# EAGLE board KKCTBN 2022 BOARD (EAGLE 9.6.1)
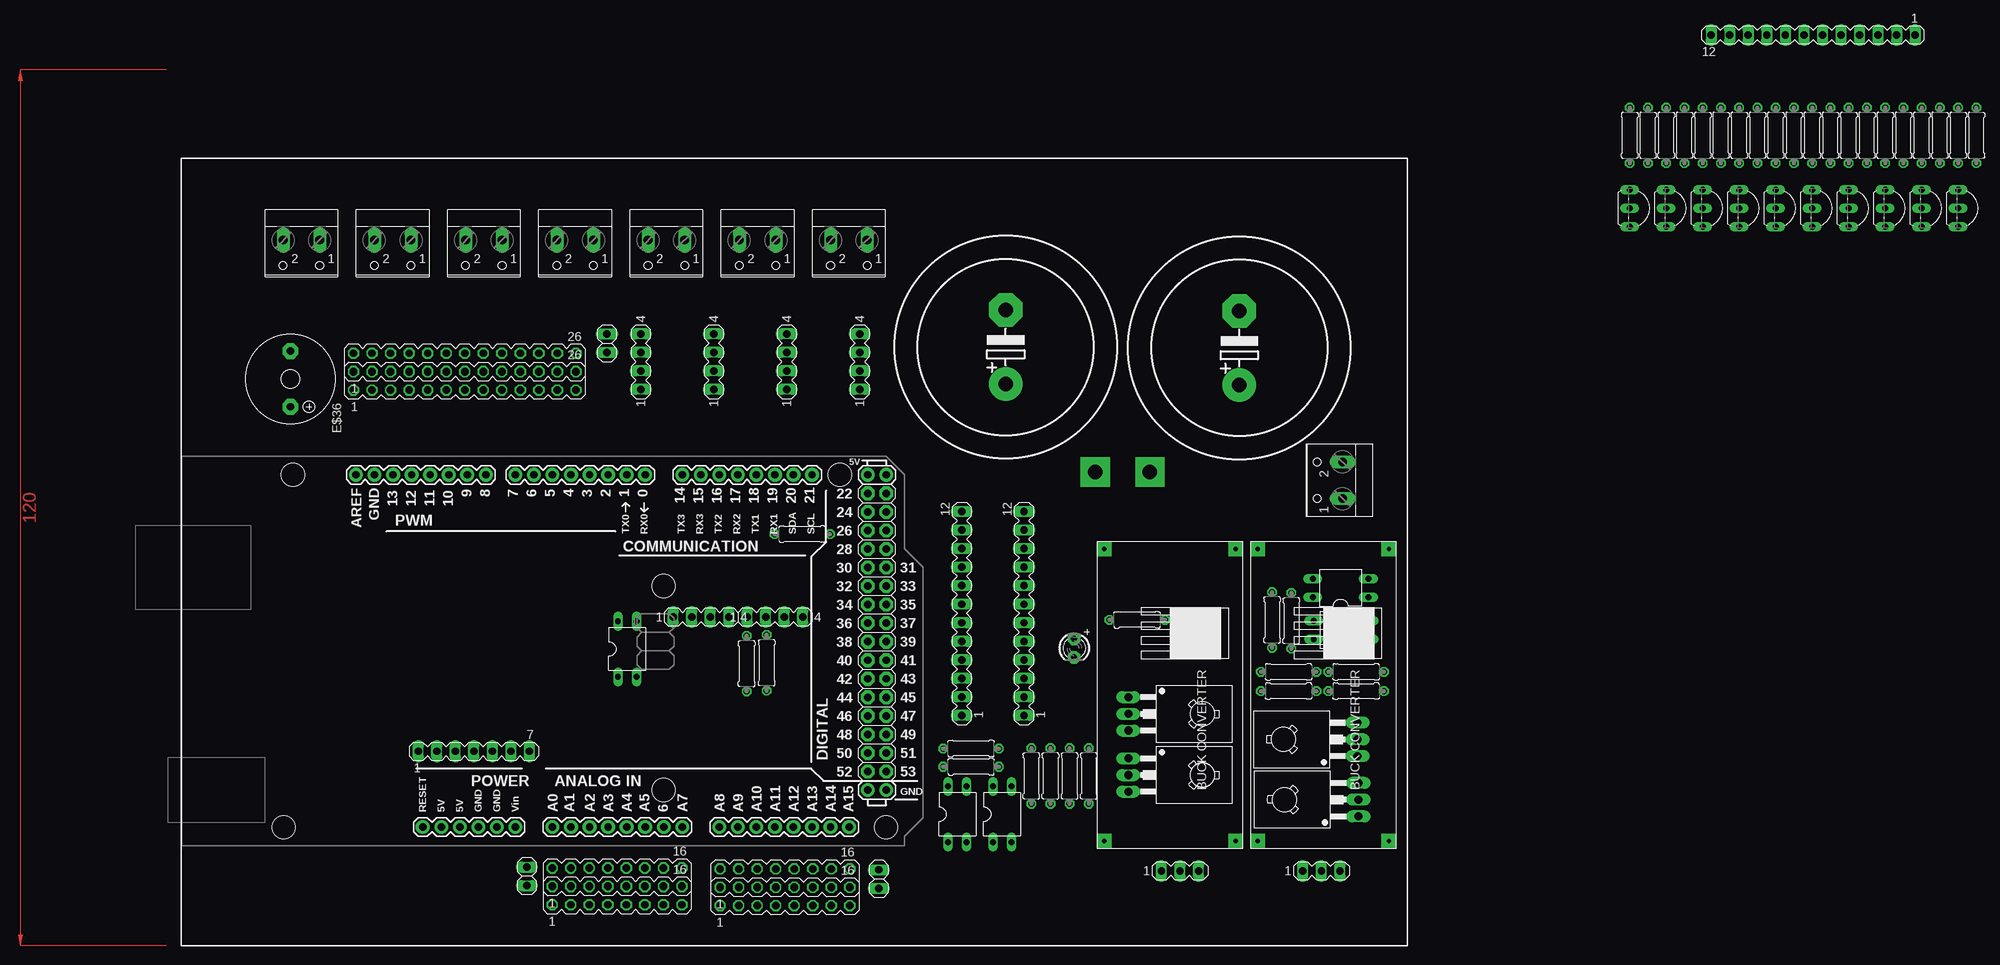
[diagram p0: board, top side]
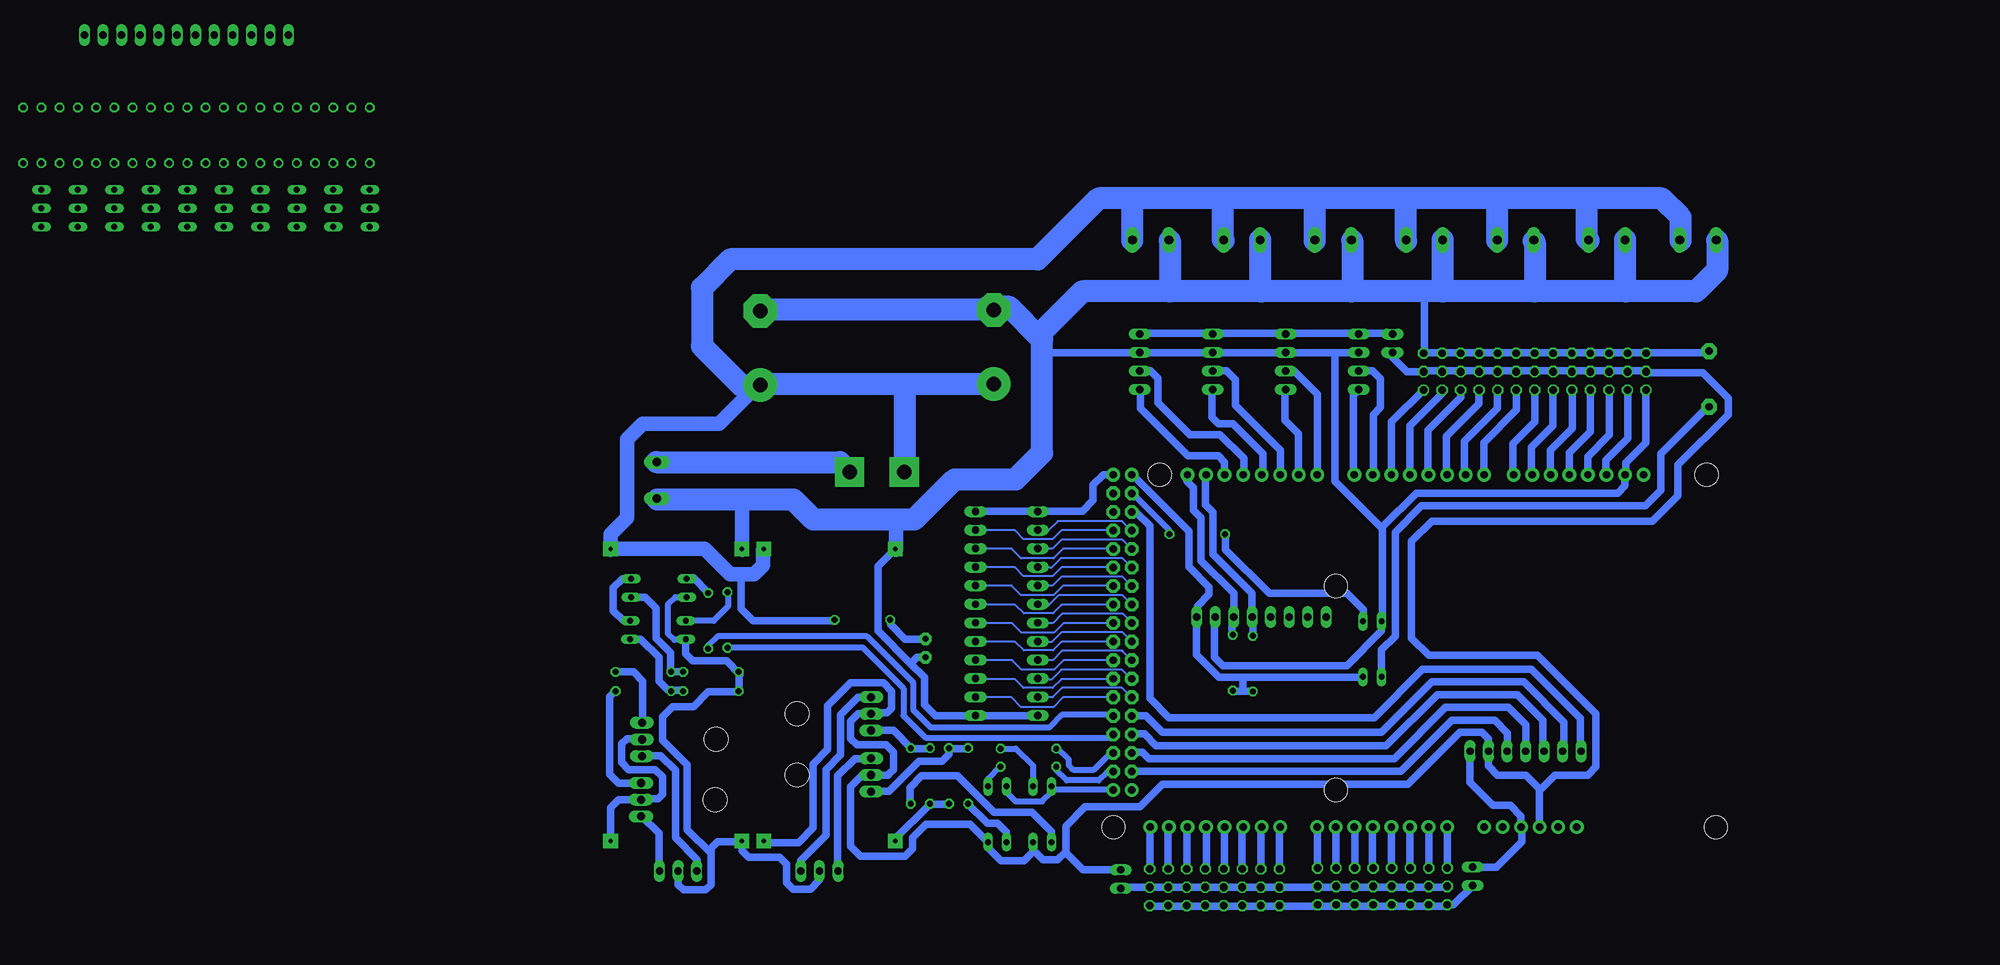
[diagram p1: board, bottom side, seen from below]

No outline drawn. Coordinates in mm, seen from the top.
Copper layers (1*16): Top 0.035mm / dielectric 1.5mm / Bottom 0.035mm
Design rules "default": minimum track width 6mil, minimum drill 0.35mm, track to track 6mil, track to pad 6mil, pad to pad 6mil, via to via 6mil, smd to smd 6mil, copper to edge 40mil, drill to drill 6mil, minimum pad ring 10mil, minimum via ring 8mil, stop-mask expansion 4mil, vias tented up to drill 0mil, thermal gap 10mil

## Footprints (pad centres in the part's own frame; a part is rotated, then mirrored left to right if it is on the bottom)
ARDUINO_MEGA = drill 1.016 pad 1.88: 0 13.97,24.13; 1 11.43,24.13; 2 8.89,24.13; 3 6.35,24.13; 3.3V -13.97,-24.13; 4 3.81,24.13; 5 1.27,24.13; 5V@0 -11.43,-24.13; 5V@1 44.45,24.13; 5V@2 46.99,24.13; 6 -1.27,24.13; 7 -3.81,24.13; 8 -7.874,24.13; 9 -10.414,24.13; 10 -12.954,24.13; 11 -15.494,24.13; 12 -18.034,24.13; 13 -20.574,24.13; 14 19.05,24.13; 15 21.59,24.13; 16 24.13,24.13; 17 26.67,24.13; 18 29.21,24.13; 19 31.75,24.13; 20 34.29,24.13; 21 36.83,24.13; A0 1.27,-24.13; A1 3.81,-24.13; A2 6.35,-24.13; A3 8.89,-24.13; A4 11.43,-24.13; A5 13.97,-24.13; A6 16.51,-24.13; A7 19.05,-24.13; A8 24.13,-24.13; A9 26.67,-24.13; A10 29.21,-24.13; A11 31.75,-24.13; A12 34.29,-24.13; A13 36.83,-24.13; A14 39.37,-24.13; A15 41.91,-24.13; AREF -25.654,24.13; GND@0 -8.89,-24.13; GND@1 -6.35,-24.13; GND@2 44.45,-19.05; GND@3 46.99,-19.05; GND@4 -23.114,24.13; RESET -16.51,-24.13; VIN -3.81,-24.13 | drill 1.016 pad 1.88 octagon: 22 44.45,21.59; 23 46.99,21.59; 24 44.45,19.05; 25 46.99,19.05; 26 44.45,16.51; 27 46.99,16.51; 28 44.45,13.97; 29 46.99,13.97; 30 44.45,11.43; 31 46.99,11.43; 32 44.45,8.89; 33 46.99,8.89; 34 44.45,6.35; 35 46.99,6.35; 36 44.45,3.81; 37 46.99,3.81; 38 44.45,1.27; 39 46.99,1.27; 40 44.45,-1.27; 41 46.99,-1.27; 42 44.45,-3.81; 43 46.99,-3.81; 44 44.45,-6.35; 45 46.99,-6.35; 46 44.45,-8.89; 47 46.99,-8.89; 48 44.45,-11.43; 49 46.99,-11.43; 50 44.45,-13.97; 51 46.99,-13.97; 52 44.45,-16.51; 53 46.99,-16.51 | hole 3.2: -34.29,24.13; -35.56,-24.13; 16.51,8.89; 16.51,-19.05; 40.64,24.13; 46.99,-24.13
MA04-1 = drill 1.016 long: 1 -3.81,0; 2 -1.27,0; 3 1.27,0; 4 3.81,0
MA13-2 = drill 1.016 octagon: 1 -15.24,-1.27; 2 -15.24,1.27; 3 -12.7,-1.27; 4 -12.7,1.27; 5 -10.16,-1.27; 6 -10.16,1.27; 7 -7.62,-1.27; 8 -7.62,1.27; 9 -5.08,-1.27; 10 -5.08,1.27; 11 -2.54,-1.27; 12 -2.54,1.27; 13 0,-1.27; 14 0,1.27; 15 2.54,-1.27; 16 2.54,1.27; 17 5.08,-1.27; 18 5.08,1.27; 19 7.62,-1.27; 20 7.62,1.27; 21 10.16,-1.27; 22 10.16,1.27; 23 12.7,-1.27; 24 12.7,1.27; 25 15.24,-1.27; 26 15.24,1.27
TO92-BCE = drill 0.813 long: B -2.54,0; C 0,0; E 2.54,0
0207/7 = drill 0.813 octagon: 1 -3.81,0; 2 3.81,0
MA12-1 = drill 1.016 long: 1 -13.97,0; 2 -11.43,0; 3 -8.89,0; 4 -6.35,0; 5 -3.81,0; 6 -1.27,0; 7 1.27,0; 8 3.81,0; 9 6.35,0; 10 8.89,0; 11 11.43,0; 12 13.97,0
BUCK_CONV = drill 0.6 pad 2 square: IN+ -17,48; IN- -17,30; OUT+ 23,48; OUT- 23,30
DIL04 = drill 0.813 long: 1 -1.27,-3.81; 2 1.27,-3.81; 3 1.27,3.81; 4 -1.27,3.81
F/TMB = drill 1.016 pad 2.159 octagon: + 3.81,0; - -3.81,0
EB30D = drill 2.007 pad 4.597: + -5.08,0 | drill 2.007 pad 4.597 octagon: - 5.08,0
W237-102 = drill 1.194 long: 1 -2.5,-1.27; 2 2.5,-1.27
MA07-1 = drill 1.016 long: 1 -7.62,0; 2 -5.08,0; 3 -2.54,0; 4 0,0; 5 2.54,0; 6 5.08,0; 7 7.62,0
TO126 = drill 1.118 long: 1 -2.286,-5.08; 2 0,-5.08; 3 2.286,-5.08 | hole 3.302: 0,5.08
MA03-1 = drill 1.016 long: 1 -2.54,0; 2 0,0; 3 2.54,0
1X02 = drill 1.016 long: 1 -1.27,0; 2 1.27,0
MA08-2 = drill 1.016 octagon: 1 -8.89,-1.27; 2 -8.89,1.27; 3 -6.35,-1.27; 4 -6.35,1.27; 5 -3.81,-1.27; 6 -3.81,1.27; 7 -1.27,-1.27; 8 -1.27,1.27; 9 1.27,-1.27; 10 1.27,1.27; 11 3.81,-1.27; 12 3.81,1.27; 13 6.35,-1.27; 14 6.35,1.27; 15 8.89,-1.27; 16 8.89,1.27
LED3MM = drill 0.813 pad 1.676 octagon: A -1.27,0; K 1.27,0

## Placement (x,y rotation side)
E$1  [ARDUINO_MEGA]  81.63,30.37 0 top
E$2  [MA04-1]  113.38,35 0 top
E$3  [MA04-1]  103.25,35 0 top
E$4  [MA04-1]  125,70 90 top
E$5  [MA04-1]  115,70 90 top
E$6  [MA04-1]  105,70 90 top
E$7  [MA04-1]  95,70 90 top
E$8  [MA13-2]  70.88,67.38 0 top
E$9  [MA13-2]  70.88,69.88 0 top
E$10  [TO92-BCE]  230.5,91 270 top
E$11  [0207/7]  230.5,101 270 top
E$12  [0207/7]  233,101 270 top
E$13  [TO92-BCE]  235.5,91 270 top
E$14  [0207/7]  235.5,101 270 top
E$15  [0207/7]  238,101 270 top
E$16  [MA12-1]  139,35.5 90 top
E$17  [MA12-1]  147.5,35.5 90 top
E$18  [BUCK_CONV]  128.5,27.31 270 top
E$19  [TO92-BCE]  240.5,91 270 top
E$20  [0207/7]  240.5,101 270 top
E$21  [0207/7]  243,101 270 top
E$22  [TO92-BCE]  245.5,91 270 top
E$23  [0207/7]  245.5,101 270 top
E$24  [0207/7]  248,101 270 top
E$25  [TO92-BCE]  250.5,91 270 top
E$26  [0207/7]  250.5,101 270 top
E$27  [0207/7]  253,101 270 top
E$28  [TO92-BCE]  255.5,91 270 top
E$29  [0207/7]  255.5,101 270 top
E$30  [0207/7]  258,101 270 top
E$31  [TO92-BCE]  260.5,91 270 top
E$32  [0207/7]  260.5,101 270 top
E$33  [0207/7]  263,101 270 top
E$34  [MA12-1]  255.62,114.75 180 top
E$35  [DIL04]  144.5,8 0 top
E$36  [F/TMB]  47,67.62 270 top
E$37  [TO92-BCE]  265.5,91 270 top
E$38  [0207/7]  265.5,101 270 top
E$39  [0207/7]  268,101 270 top
E$40  [TO92-BCE]  270.5,91 270 top
E$41  [0207/7]  270.5,101 270 top
E$42  [0207/7]  273,101 270 top
E$43  [TO92-BCE]  275.5,91 270 top
E$44  [0207/7]  275.5,101 270 top
E$45  [0207/7]  278,101 270 top
E$46  [BUCK_CONV]  149.5,27.31 270 top
E$47  [EB30D]  177,71.88 90 top
E$48  [EB30D]  145,72 90 top
E$49  [W237-102]  189.88,53.75 90 top
E$50  [DIL04]  93.12,30.62 0 top
E$51  [0207/7]  140.25,17 0 top
E$52  [0207/7]  117.12,46.38 0 top
E$53  [MA07-1]  72.12,16.62 0 top
E$54  [DIL04]  138.38,8 0 top
E$55  [0207/7]  140.25,14.5 0 top
E$56  [TO126]  188.12,18.25 90 top
E$57  [TO126]  188.25,10 90 top
E$58  [TO126]  166.88,21.75 270 top
E$59  [TO126]  166.88,13.38 270 top
E$60  [W237-102]  48.5,85.38 180 top
E$61  [W237-102]  61,85.38 180 top
E$62  [W237-102]  73.5,85.38 180 top
E$63  [W237-102]  86,85.38 180 top
E$64  [W237-102]  98.5,85.38 180 top
E$65  [W237-102]  111,85.38 180 top
E$66  [W237-102]  123.5,85.38 180 top
E$67  [MA03-1]  168.88,0.25 0 top
E$68  [DIL04]  190.88,39 90 top
E$69  [DIL04]  191,33.25 90 top
E$70  [0207/7]  184.12,34.5 90 top
E$71  [0207/7]  181.5,34.62 90 top
E$72  [MA03-1]  188.25,0.25 0 top
E$73  [0207/7]  153.75,13.25 90 top
E$74  [0207/7]  156.38,13.25 90 top
E$75  [0207/7]  148.5,13.25 90 top
E$76  [0207/7]  151.12,13.25 90 top
E$77  [0207/7]  183.75,27.5 180 top
E$78  [0207/7]  183.75,24.88 180 top
E$79  [0207/7]  193,27.5 180 top
E$80  [0207/7]  193,24.88 180 top
E$81  [1X02]  90.38,72.5 90 top
E$82  [MA08-2]  91.75,-0.62 0 top
E$83  [MA08-2]  114.75,-0.75 0 top
E$84  [MA08-2]  114.75,-3.25 0 top
E$85  [MA08-2]  91.75,-3.12 0 top
E$86  [1X02]  127.62,-0.88 270 top
E$87  [1X02]  79.38,-0.5 270 top
E$88  [LED3MM]  154.38,30.75 270 top
E$89  [0207/7]  163,34.62 0 top
E$90  [0207/7]  109.5,28.62 90 top
E$91  [0207/7]  112.25,28.75 90 top

## Library data of the parts
E$1 = SparkFun-Boards
E$2-E$9 E$16 E$17 E$34 E$53 E$67 E$72 E$82-E$85 = con-lstb
E$10 E$13 E$19 E$22 E$25 E$28 E$31 E$37 E$40 E$43 = transistor-neu-to92
E$11 E$12 E$14 E$15 E$20 E$21 E$23 E$24 E$26 E$27 E$29 E$30 E$32 E$33 E$38 E$39 E$41 E$42 E$44 E$45 E$51 E$52 E$55 E$70 E$71 E$73-E$80 E$89-E$91 = resistor
E$18 E$46 = KRSBI COMPONENT
E$35 E$50 E$54 E$68 E$69 = ic-package
E$36 = buzzer
E$47 E$48 = rcl
E$49 E$60-E$66 = con-wago-500
E$56-E$59 = transistor-fet
E$81 E$86 E$87 = Connector
E$88 = adafruit

## Nets
S$68: E$53.4
S$81: E$67.2

## Tracks (layer width: path | path; a pad name or v marks a point on that pad's centre or on a via)
S$1
  Bottom 1: 116,54.62 116,50.38 115,49.38 115,43.62 109.62,38.25 109.62,34.88
S$2
  Bottom 1: 118.5,54.62 118.5,53.62 117.62,52.75 117.62,49.62 116.62,48.62 116.62,42.75 112.12,38.25 112.12,35 112.38,34.75 112.38,32.38
S$3
  Bottom 1: 125.25,73.75 125.12,73.88 95,73.88 93.38,73.88 90.5,73.88 90.38,73.75
S$5
  Bottom 1: 86,66.25 90.5,61.75 90.5,54.38
S$6
  Bottom 1: 83.62,66.25 83.62,65.62 88,61.25 88,54.5
S$7
  Bottom 1: 81,66.25 81,65.12 85.5,60.62 85.5,54.38
S$8
  Bottom 1: 78.5,66.12 78.5,64.25 83,59.75 83,54.5
S$9
  Bottom 1: 76,66.12 76,63.62 80.5,59.12 80.5,54.38
S$10
  Bottom 1: 73.38,66.12 73.38,63.38 77.88,58.88 77.88,54.38
S$11
  Bottom 1: 70.88,66.12 70.88,61.75 73.88,58.75 73.88,54.62
S$12
  Bottom 1: 68.38,66.12 68.38,61.25 71.38,58.25 71.38,54.5
S$13
  Bottom 1: 65.75,66.25 65.75,60.88 68.75,57.88 68.75,54.5
S$14
  Bottom 1: 63.25,66.12 63.25,60.38 66.12,57.5 66.12,54.38
S$15
  Bottom 1: 60.62,66.25 60.62,60 63.62,57 63.62,54.25
S$16
  Bottom 1: 58.12,66.12 58.12,59.5 61.12,56.5 61.12,54.5
S$17
  Bottom 1: 113.38,54.5 113.38,56.25 114.25,57.12 118.38,57.12 124.88,63.62 124.88,66 125.12,66.25
S$18
  Bottom 1: 110.75,54.5 110.75,56.75 114,60 118.12,60 122.5,64.38 122.5,67.75 123.5,68.75 125.25,68.75
S$19
  Bottom 1: 108.12,54.38 108.12,57.38 112.25,61.5 114.25,61.5 115.12,62.38 115.12,66.25
S$20
  Bottom 1: 105.75,54.5 105.75,57.88 111.88,64 111.88,67.5 113.12,68.75 115,68.75
S$21
  Bottom 1: 103.25,54.5 103.25,60.12 105.12,62 105.12,66.25
S$22
  Bottom 1: 100.62,54.38 100.62,65.5 103.88,68.75 105.12,68.75
S$23
  Bottom 1: 95.75,54.5 95.75,65.38 95,66.12
S$24
  Bottom 1: 93,54.5 93,62.75 92,63.75 92,67.62 93.12,68.75 95,68.75
S$25
  Bottom 0.3: 128.62,41.81 135.75,41.81 136.94,40.62 140.94,40.62 142.12,41.81 147.44,41.81
S$26
  Bottom 0.3: 128.62,46.88 135.75,46.88 136.94,45.69 140.94,45.69 142.12,46.88 147.44,46.88
S$27
  Bottom 0.3: 126.06,46.81 127.41,48.16 136.21,48.16 137.56,46.81 139,46.81
S$28
  Bottom 0.3: 128.56,44.38 135.5,44.38 136.81,43.06 141.25,43.06 142.56,44.38 147.44,44.38
S$29
  Bottom 0.3: 126.12,44.38 127.38,45.62 135.69,45.62 136.94,44.38 138.94,44.38
S$30
  Bottom 0.3: 126.06,41.75 127.39,43.07 135.8,43.07 137.12,41.75 139,41.75
S$31
  Bottom 0.3: 128.56,39.31 135.5,39.31 136.81,38 141.25,38 142.56,39.31 147.44,39.31
S$32
  Bottom 0.3: 126.12,39.31 127.34,40.52 135.73,40.52 136.94,39.31 138.94,39.31
S$33
  Bottom 0.3: 128.56,36.69 135.69,36.69 136.88,35.5 140.88,35.5 142.06,36.69 147.38,36.69
S$34
  Bottom 0.3: 126,36.62 127.38,38 136.12,38 137.5,36.62 138.94,36.62
S$35
  Bottom 0.3: 128.5,34.19 135.44,34.19 136.75,32.88 141.19,32.88 142.5,34.19 147.38,34.19
S$36
  Bottom 0.3: 126.06,34.19 127.31,35.44 135.62,35.44 136.88,34.19 138.88,34.19
S$37
  Bottom 0.3: 128.56,31.62 135.69,31.62 136.88,30.44 140.88,30.44 142.06,31.62 147.38,31.62
S$38
  Bottom 0.3: 126,31.56 127.38,32.94 135.69,32.94 137.06,31.56 138.94,31.56
S$39
  Bottom 0.3: 128.5,29.12 135.44,29.12 136.75,27.81 141.19,27.81 142.5,29.12 147.38,29.12
S$40
  Bottom 0.3: 127.31,30.38 135.62,30.38 136.88,29.12 138.88,29.12
S$41  (via drill 2 pad 4)
  Bottom 3: 191.25,56.25 166.12,56.25 v164.75,54.88
S$42
  Bottom 0.3: 126.12,29.06 127.38,30.31
S$43
  Bottom 0.3: 128.62,26.5 135.75,26.5 136.94,25.31 140.94,25.31 142.12,26.5 147.44,26.5
S$44
  Bottom 0.3: 126.06,26.44 127.44,27.81 135.75,27.81 137.12,26.44 139,26.44
S$45
  Bottom 0.3: 128.56,24 135.5,24 136.81,22.69 141.25,22.69 142.56,24 147.44,24
S$46
  Bottom 0.3: 126.12,24 127.44,25.31 135.62,25.31 136.94,24 138.94,24
S$47
  Bottom 2: 158.38,44.25 158.38,48.75 158.5,48.88
S$48  (via drill 2 pad 4)
  other vias: 157.25,54.88
S$49
  Bottom 2: 197.5,44.38 184.62,44.38 181.12,40.88 177.88,40.88 176.62,42.12 176.62,44.25
S$50
  Bottom 1: 187,40.38 186.12,40.38 184.12,38.38
S$51
  Bottom 3: 50.88,86.62 50.88,89.75 53.5,92.38 63.75,92.38 | 63.75,92.38 76.25,92.38 | 76.25,92.38 88.5,92.38 | 88.5,92.38 101,92.38 | 101,92.38 113.62,92.38 | 113.62,92.38 126,92.38 | 126,92.38 130.62,92.38 139,84 181.12,84 185,80.12 185,72.12 179.62,66.75 176.75,66.75 | 126,86.62 126,92.38 | 113.5,86.62 113.62,86.75 113.62,92.38 | 101,86.5 101,92.38 | 88.5,86.5 88.5,92.38 | 76,86.62 76,92.12 76.25,92.38 | 63.5,86.62 63.75,86.88 63.75,92.38
S$52
  Bottom 3: 145,77.12 177.12,77.12
S$53
  Bottom 3: 45.88,86.62 45.88,82.5 48.75,79.62 58.38,79.62 | 58.38,79.62 70.88,79.62 | 70.88,79.62 83.5,79.62 | 83.5,79.62 96,79.62 | 96,79.62 108.38,79.62 | 108.38,79.62 120.88,79.62 | 120.88,79.62 132.88,79.62 138.38,74.12 138.38,73 | 191.12,51.12 172.5,51.12 169.75,48.38 155.88,48.38 150.38,53.88 142,53.88 138.38,57.5 138.38,73 | 138.38,73 142.88,77.5 145.62,77.5 | 145.88,77.5 145.62,77.5 | 145.62,77.5 144.62,76.5 | 58.5,86.75 58.5,79.75 58.38,79.62 | 71,86.5 70.88,86.38 70.88,79.62 | 83.5,86.75 83.5,79.62 | 95.88,86.62 95.88,79.75 96,79.62 | 108.5,86.75 108.5,79.75 108.38,79.62 | 120.88,86.62 120.88,79.62
S$54
  Bottom 1: 126.12,49.38 125.5,49.38 123.62,47.5 123.62,23.88 121,21.25 92.88,21.25 86.25,27.88 71.38,27.88 64.62,21.12 64.62,16.5
S$55
  Bottom 1: 56.12,71.25 55.88,71
S$56
  Bottom 2: 197.5,44.25 197.5,46.38 195.25,48.62 195.25,59.38 193.12,61.5 182.62,61.5 177.25,66.88
S$57
  Bottom 1: 161.88,21.75 163.62,21.75 164.62,20.75 164.62,18.38 163.75,17.5 159.75,17.5 158.75,16.5 158.75,14.12 159.25,13.62 159.5,13.38 161.75,13.38
S$58
  Bottom 1: 128.5,54.5 130,54.5 131.38,53.12 131.38,51 132.88,49.5 147.62,49.5
S$59
  Bottom 1: 46.88,71.25 55.62,71.25
S$60
  Bottom 1: 113.25,46.38 113.25,44.25 107.25,38.25 96.62,38.25 94.38,36 94.38,34.38
S$61
  Bottom 1: 114.75,35 114.75,29.5 113.62,28.38 96.62,28.38 91.88,33.12 91.88,34.5
S$62
  Bottom 1: 58.5,54.75 58.5,53 59.5,52 87.12,52 91.75,47.38 91.75,47.12 | 91.75,47.12 91.75,34.12 | 91.75,47.12 98.25,53.62 98.25,71.25 | 137.88,71.25 98.25,71.25 | 98.25,71.25 95,71.25
S$63
  Bottom 1: 72.75,6.25 72.75,7.75 74.25,9.25 76.62,9.25 79.75,12.38 79.75,16.62
S$64
  Bottom 1: 109.62,32.25 109.5,32.38 109.5,35.25
S$65
  Bottom 2: 176.75,76.75 176.62,76.88
S$66
  Bottom 1: 161.75,15.62 164,15.62 166.38,13.25 166.38,0.25
S$67
  Bottom 1: 74.62,16.62 74.62,19.12 76.38,20.88 82.25,20.88 89.25,13.88 126,13.88
S$68
  Bottom 1: E$53.4 72.12,20.25 74.5,22.62 83.12,22.62 90.12,15.62 123.75,15.62 124.62,16.5 126,16.5 126.12,16.38
S$69
  Bottom 1: 126.12,19 124.38,19 122.75,17.38 91.25,17.38 84.25,24.38 73.25,24.38 69.75,20.88 69.75,16.62
S$70
  Bottom 1: 66.88,16.62 66.88,20.62 72.38,26.12 85,26.12 91.88,19.25 121.88,19.25 124.12,21.5 126.25,21.5
S$71
  Bottom 0.8: 126.12,52 126,52 121,47 121,46.38
S$72
  Bottom 0.8: 128.62,13.75 129.5,13.75 130.62,12.62 135,12.62 136.5,14.12 136.5,14.75
S$73
  Bottom 0.8: 136.38,17.12 134.75,15.5 134.75,14.75 134.12,14.12 131.25,14.12 128.75,16.62
S$74
  Bottom 0.8: 144.12,14.5 145.75,12.88 145.75,11.62
S$75
  Bottom 0.8: 144,17 142,17 139.62,14.62 139.62,11.88
S$76
  Bottom 0.8: 143.25,11.88 143.25,11 142,9.75 138.38,9.75 137.12,11 137.12,11.88 136.62,11.38 128.38,11.38
S$77
  Bottom 0.8: 128.62,21.62 135.62,21.62 137.38,19.88 153.62,19.88 156,22.25 156,26 162.38,32.38 182.88,32.38 184.12,31.12 184.12,30.62
S$78
  Bottom 1: 138.88,21.62 139,21.5 153,21.5 154.5,23 154.5,26.75 156.38,28.62 | 156.38,28.62 160.88,33.12 160.88,42 158.62,44.25 | 154.5,29.5 155.5,29.5 156.38,28.62
S$79
  Bottom 1: 153.75,17 156.25,17 158.75,19.5 162,19.5
S$80
  Bottom 1: 148.38,17 151,17 151.12,17.12
S$81
  Bottom 1: E$67.2 168.88,-1 170.12,-2.25 172.5,-2.25 173.38,-1.38 173.38,1.12 174.38,2.12 178.62,2.12 179.5,3 179.5,4.12
S$82
  Bottom 1: 171.5,0.25 171.5,1.62 168,5.12 168,14.12 166,16.12 166,21.62 163.62,24 161.75,24
S$83
  Bottom 1: 153.88,9.25 158.5,4.62 158.5,4.5 158.62,4.38 158.62,4
S$84
  Bottom 1: 162,21.88 159.62,21.88 159,22.5 159,24.88 160.12,26 164.62,26 167.75,22.88 167.75,16.88 169.75,14.88 169.75,6.12 171.75,4.12 176.38,4.12
S$85
  Bottom 0.8: 181.5,30.88 163,30.88 157.38,25.25 157.38,21.5 154.38,18.5 128.62,18.5
S$86
  Bottom 2: 179.5,44.25 179.5,51.62
S$87
  Bottom 0.8: 181.38,38.25 181.38,36.5 183.38,34.5 187.25,34.5
S$88
  Bottom 0.8: 187,31.88 188.75,31.88 189.62,32.75 189.62,36.75 188.62,37.75 187.12,37.75
S$89
  Bottom 1: 194.88,34.5 195.75,34.5 197.12,35.88 197.12,39 195.88,40.25 194.62,40.25
S$90
  Bottom 1: 194.62,37.75 192.75,37.75 191.25,36.25 191.25,32.12 189.25,30.12 189.25,27.62 189.12,27.5 187.75,27.5
S$91
  Bottom 1: 161.75,11.12 159.38,11.12 155.25,15.25 152.12,15.25 151.12,16.25 151.12,17.25
S$92
  Bottom 1: 153.75,9.5 153.62,9.38 151.12,9.38
S$93
  Bottom 1: 148.5,9.38 145.88,6.75 144.5,6.75 143.25,5.5 143.25,4.12
S$94
  Bottom 1: 154.38,32 157.12,32 159.12,34 159.12,34.62
S$95
  Bottom 1: 187.5,24.88 187.62,25 189.62,25 190.88,26.25 190.88,29.5 193.38,32 194.88,32
S$96
  Bottom 1: 193.12,20.38 193.12,26.25 194.38,27.5 196.75,27.5
S$97
  Bottom 1: 193.38,12.25 196.38,12.25 197.62,13.5 197.62,24.12 196.88,24.88
S$98
  Bottom 1: 193.38,18.38 195.25,18.38 196,17.62 196,15.12 195,14.12 191.38,14.12 190.38,13.12 190.38,10.75 191,10.12 193.25,10.12
S$99
  Bottom 1: 197.5,4.25 197.5,8.88 196.38,10 193.12,10
S$100
  Bottom 1: 193.25,7.75 190.88,5.38 190.88,0.12
S$101
  Bottom 1: 193.12,16 190.62,16 188.62,14 188.62,4.75 185.62,1.75 185.62,0.25
S$102
  Bottom 1: 188.25,0.38 188.25,-1.62 187.5,-2.38 184.5,-2.38 183.75,-1.62 183.75,2.62 | 183.75,2.62 183.75,3.38 182.88,4.25 179.5,4.25 | 183.75,2.62 187,5.88 187,14.75 190.38,18.12 190.38,21.38 189,22.75 186.12,22.75 184.12,24.75 180,24.75
S$103
  Bottom 1: 179.88,27.5 179.88,27 | 179.88,24.88 179.88,27 | 179.88,27 179.75,27.12 181.62,29 186.25,29 187.25,30 187.25,32
S$104
  Bottom 1: 156.5,9.5 156.5,11.62 154.88,13.25 150,13.25 145,8.25 139.75,8.25 137.12,5.62 137.12,4
S$105
  Bottom 1: 162,13.25 163.12,13.25 164.62,11.75 164.62,3.62 163.25,2.25 157.12,2.25 156.12,3.25 156.12,4.75 154.25,6.62 148.25,6.62 145.88,4.25
S$106
  Bottom 1: 58.38,54.25 58.38,56.12 55.62,58.88 55.62,66
S$107
  Bottom 1: 86.25,68.75 55.5,68.75
S$108
  Bottom 1: 86,68.62 88.38,68.62 90.38,70.62 90.38,71.12
S$109
  Bottom 1: 47.12,63.88 53.62,57.38 53.62,52.38 55.75,50.25 86.38,50.25 90,46.62 90,32.38 91.88,30.5 91.88,26.75
S$110
  Bottom 3: 157.12,55 157.12,66.88 | 144.88,66.88 157.12,66.88 | 157.12,66.88 177,66.88 177.12,67
S$111
  Bottom 1: 55.75,71.25 86,71.25 | 86,71.25 86.12,71.12 | 86,71.25 86,80 85.88,80.12
S$112
  Bottom 1: 126.12,54.62 118.25,46.75 118.25,41.88 115.5,39.12 115.5,38.12 117.12,36.5 117.12,34.75
S$113
  Bottom 1: 82.88,0.62 82.88,6.25
S$114
  Bottom 1: 70.25,6.12 70.25,11.25 68.12,13.38 63.62,13.38 62.5,14.5 62.5,21.75 70.5,29.75 85.38,29.75 87.75,32.12 87.75,45.38 85,48.12 54.75,48.12 51.25,51.62 51.25,55.88 44.38,62.75 44.38,65 47.88,68.5 55.5,68.5
S$115
  Bottom 1: 85.38,0.5 85.38,6.12 85.5,6.25
S$116
  Bottom 1: 87.88,0.62 88,0.75 88,6.25
S$117
  Bottom 1: 90.5,0.62 90.5,6.12 90.62,6.25
S$118
  Bottom 1: 93,0.62 93.12,0.75 93.12,6.25
S$119
  Bottom 1: 95.5,0.62 95.5,6.12 95.62,6.25
S$120
  Bottom 1: 98.12,0.62 98.12,6.12
S$121
  Bottom 1: 100.62,0.5 100.62,6.25
S$122
  Bottom 1: 105.88,0.5 105.88,6.12 105.75,6.25
S$123
  Bottom 1: 108.38,0.38 108.38,6.12
S$124
  Bottom 1: 111,0.38 111,6.12 110.88,6.25
S$125
  Bottom 1: 113.38,0.5 113.38,6.12
S$126
  Bottom 1: 115.88,0.38 115.88,6.25
S$127
  Bottom 1: 118.5,0.38 118.5,6.25
S$128
  Bottom 1: 121.12,0.5 121.12,6 121,6.12
S$129
  Bottom 1: 123.5,0.38 123.62,0.5 123.62,6.12
S$130
  Bottom 1: 123.62,-2 83,-2 82.88,-1.88
S$131
  Bottom 1: 123.75,-4.62 82.75,-4.62 82.62,-4.5
S$132
  Bottom 1: 79.25,-1.62 82,-4.38 82.88,-4.38
S$133
  Bottom 1: 72.62,6.25 72.62,4.25 76.12,0.75 79.38,0.75
S$134
  Bottom 1: 123.75,-2 127.5,-2 127.75,-2.25
S$135
  Bottom 1: 127.62,0.38 132.75,0.38 135.12,2.75 135.12,2.88 | 139.62,3.12 139.62,2.88 140.88,1.62 144,1.62 145.75,3.38 145.75,4.12 | 139.62,4.25 139.62,3.12 | 139.62,3.12 138.25,1.75 136.25,1.75 135.12,2.88 | 135.12,2.88 135.12,6.38 132.5,9 125,9 121.88,12.12 88.25,12.12 81.12,19.25 78.12,19.25 77.25,18.38 77.25,14.62 76,13.38 72.12,13.38 70.25,11.5 70.25,6.38
S$136
  Bottom 1: 166.88,34.5 178,34.5 179.62,36.12 179.62,41.25
S$137
  Bottom 1: 112.25,24.88 110.88,24.88 | 110.88,24.88 109.5,24.88 109.38,24.75 | 117.25,35 117.25,29.88 114.12,26.75 110.88,26.75 | 110.88,26.75 94.38,26.75 | 110.88,24.88 110.88,26.75
(copper drawn outside any net)
  shapes: Top area x1